# EAGLE board con connector (EAGLE 9.0.1)
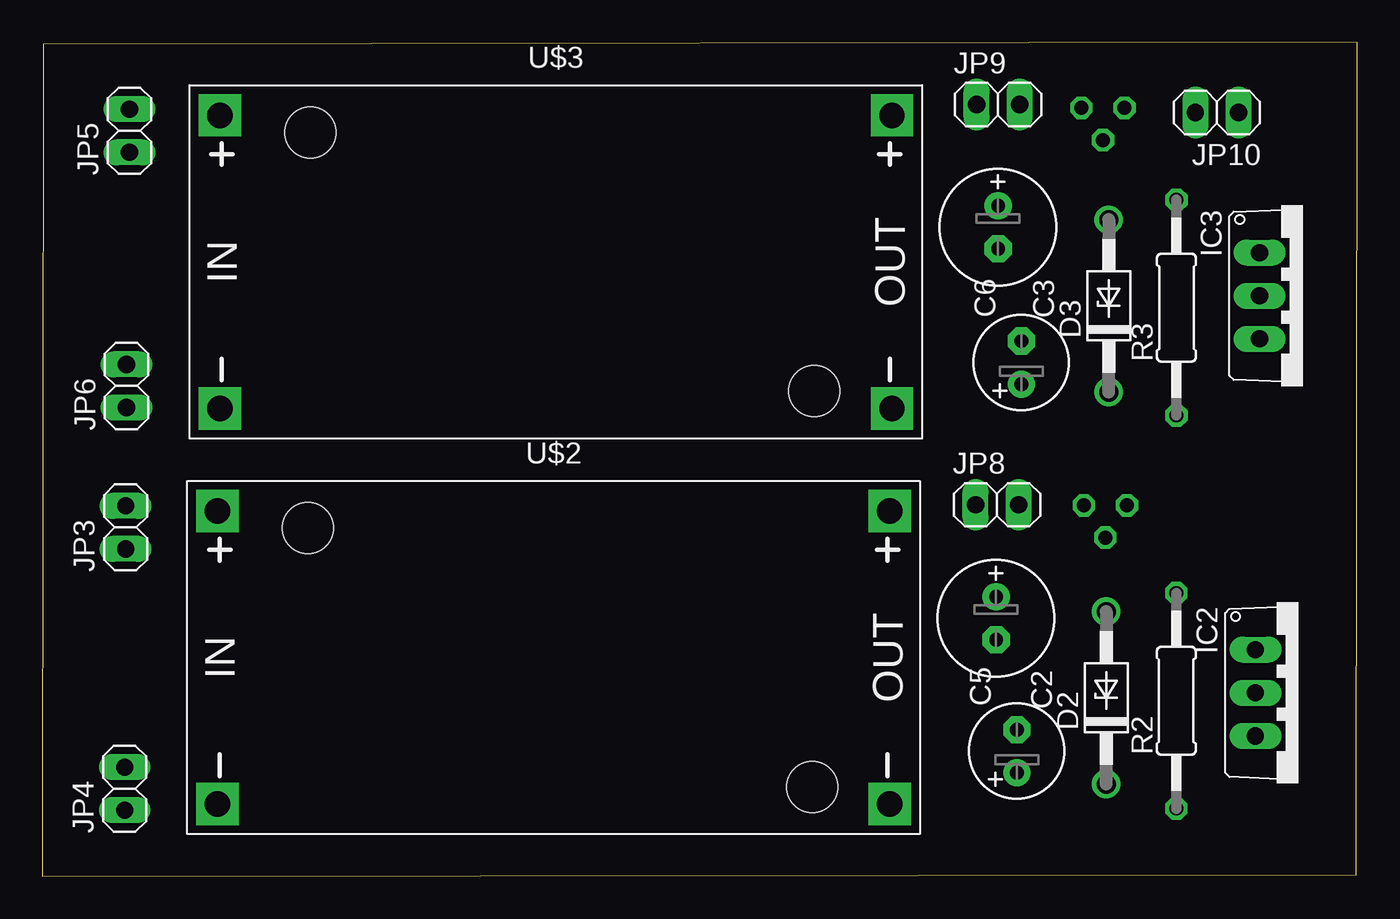
[diagram p0: board, top side]
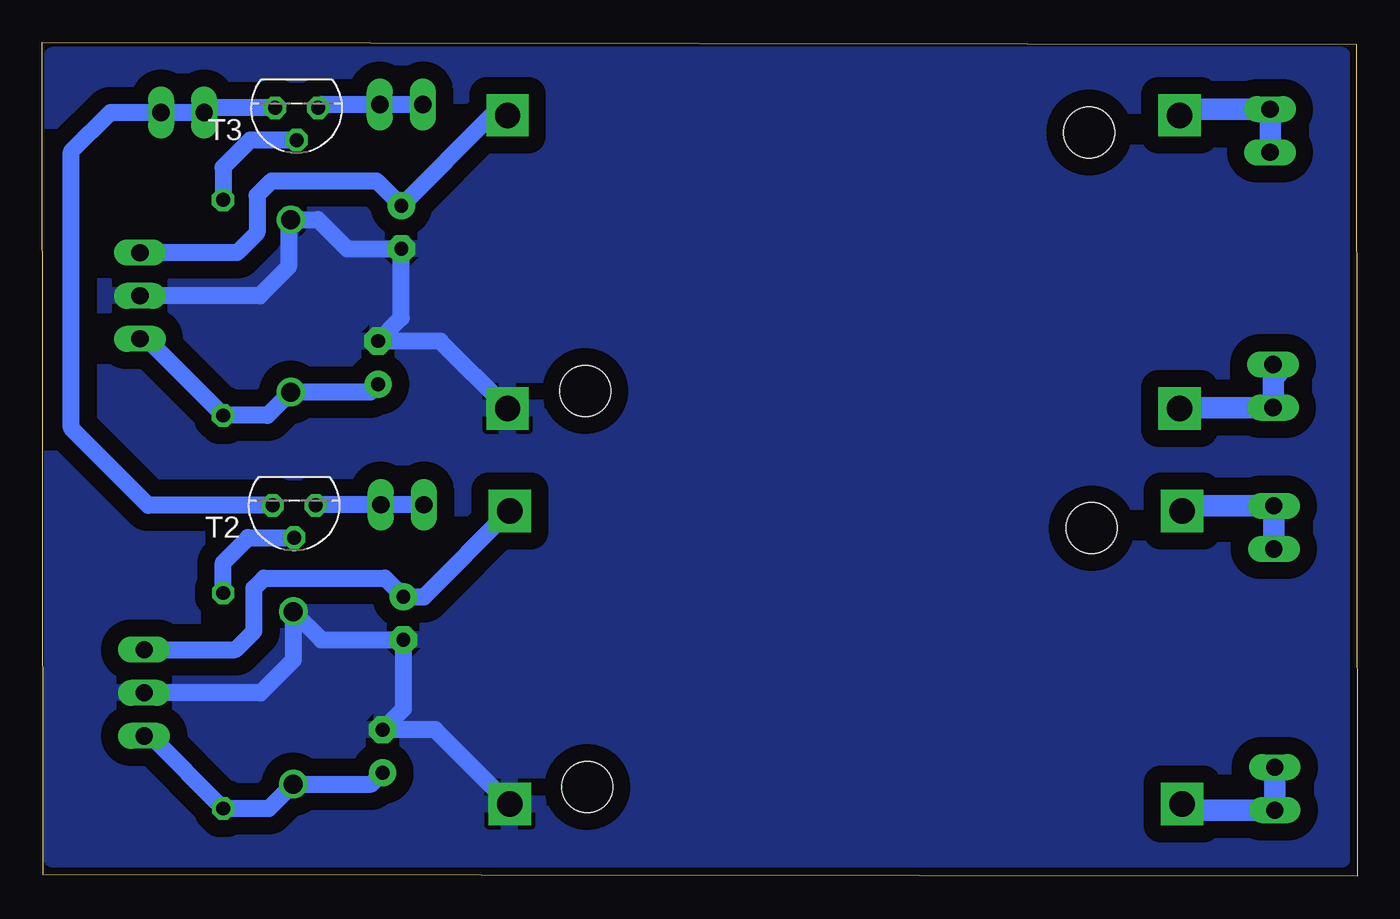
[diagram p1: board, bottom side, seen from below]

Size 77.5 x 49.15 mm. Coordinates in mm from the lower left corner, seen from the top.
Outline: 0,0 77.45,0.1 77.5,49.15 0.05,49.05 0,0
Copper layers (1*16): Top 0.035mm / dielectric 1.5mm / Bottom 0.035mm
Design rules "default *": minimum track width 30mil, minimum drill 1mm, track to track 8mil, track to pad 8mil, pad to pad 8mil, via to via 8mil, smd to smd 8mil, copper to edge 0mil, drill to drill 6mil, minimum pad ring 10mil, minimum via ring 8mil, stop-mask expansion 4mil, vias tented up to drill 0mil, thermal gap 10mil

## Footprints (pad centres in the part's own frame; a part is rotated, then mirrored left to right if it is on the bottom)
E2,5-7 = drill 0.813 pad 1.6: + -1.27,0 | drill 0.813 pad 1.6 octagon: - 1.27,0
E2,5-6 = drill 0.813 pad 1.6: + -1.27,0 | drill 0.813 pad 1.6 octagon: - 1.27,0
DO41Z10 = drill 1.118: A 5.08,0; C -5.08,0
TO220V = drill 1.016 long: 1 -2.54,-2.54; 2 0,-2.54; 3 2.54,-2.54
1X02 = drill 1.016 long: 1 -1.27,0; 2 1.27,0
0207/12 = drill 0.813 octagon: 1 -6.35,0; 2 6.35,0
TO92 = drill 0.813 octagon: 1 1.27,0; 2 0,1.905; 3 -1.27,0
DC-DC-STEP-DOWN-LM2596 = drill 1.5 pad 2.5 square: IN+ -19.812,8.636; IN- -19.812,-8.636; OUT+ 19.812,8.636; OUT- 19.812,-8.636 | hole 3: -14.478,7.62; 15.24,-7.62

## Placement (x,y rotation side)
C2  100uF  [E2,5-7]  56.22,15.21 270 top
C3  100uF'  [E2,5-7]  56.34,38.26 270 top
C5  10uF  [E2,5-6]  57.44,7.38 90 top
C6  10uF  [E2,5-6]  57.71,30.28 90 top
D2  1N4733A  [DO41Z10]  62.71,10.52 90 top
D3  1N4733A  [DO41Z10]  62.86,33.62 90 top
IC2  7805TV  [TO220V]  74.05,10.82 270 top
IC3  7805TV  [TO220V]  74.3,34.22 270 top
JP3  [1X02]  4.9,20.57 90 top
JP4  [1X02]  4.85,5.17 90 top
JP5  [1X02]  5.13,43.94 90 top
JP6  [1X02]  4.95,28.91 90 top
JP8  [1X02]  56.28,21.91 0 top
JP9  [1X02]  56.34,45.49 0 top
JP10  GND  [1X02]  69.24,45.02 180 top
R2  10k  [0207/12]  66.84,10.35 90 top
R3  10k  [0207/12]  66.85,33.52 90 top
T2  BC547  [TO92]  62.66,21.87 180 bottom
T3  BC547  [TO92]  62.52,45.3 180 bottom
U$2  DC-DC-STEP-DOWN-LM2596  [DC-DC-STEP-DOWN-LM2596]  30.14,12.9 0 top
U$3  DC-DC-STEP-DOWN-LM2596  [DC-DC-STEP-DOWN-LM2596]  30.27,36.22 0 top

## Library data of the parts
C2 C3 C5 C6 = rcl; SPICEPREFIX: C
D2 D3 = diode
IC2 IC3 = linear
JP3-JP6 JP8-JP10 = pinhead
R2 R3 = rcl; SPICEPREFIX: R
T2 T3 = transistor
U$2 U$3 = diy-modules

## Nets
GND: C2.- C3.- C5.- C6.- D2.A D3.A IC2.2 IC3.2 U$2.OUT- U$3.OUT-
N$3: C2.+ IC2.1 U$2.OUT+
N$5: C3.+ IC3.1 U$3.OUT+
N$8: C5.+ D2.C IC2.3 R2.1
N$9: C6.+ D3.C IC3.3 R3.1
N$16: R2.2 T2.2
N$17: R3.2 T3.2
N$18: JP10.1 JP10.2 T2.1 T3.1
N$22: JP3.1 JP3.2 U$2.IN+
N$23: JP4.1 JP4.2 U$2.IN-
N$24: JP5.1 JP5.2 U$3.IN+
N$25: JP6.1 JP6.2 U$3.IN-
N$27: JP8.1 JP8.2 T2.3
N$28: JP9.1 JP9.2 T3.3

## Tracks (layer width: path | path; a pad name or v marks a point on that pad's centre or on a via)
GND
  Bottom 0.762: 62.82,38.74 D3.A
  Bottom 1.016: IC2.2 64.64,10.82 62.71,12.75 D2.A 61.05,13.94 C2.- 56.22,9.87 C5.- 54.34,8.65 U$2.OUT- | IC3.2 64.69,34.22 62.99,35.92 62.99,38.56 D3.A 61.26,38.7 59.54,36.98 C3.- | C3.- | U$3.OUT- 54.04,31.55 C6.- 56.34,32.91 C3.-
  pour Bottom (isolate 1.016): 0.89,48.39 76.91,48.39 76.91,1.04 0.89,1.04
N$3
  Bottom 1.016: IC2.1 66.11,13.36 65.02,14.45 65.02,16.99 64.44,17.58 57.31,17.58 C2.+ 55.01,16.48 U$2.OUT+
N$5
  Bottom 1.016: IC3.1 66.03,36.76 64.85,37.95 64.85,40.13 63.98,41 57.8,41 C3.+ 51.01,44.86 U$3.OUT+
N$8
  Bottom 1.016: C5.+ 58.11,5.44 D2.C 64.15,4 R2.1 71.12,8.28 IC2.3
N$9
  Bottom 1.016: C6.+ 58.18,28.54 D3.C 64.23,27.17 R3.1 71.36,31.68 IC3.3
N$16
  Bottom 1.016: R2.2 66.84,18.5 65.38,19.97 T2.2
N$17
  Bottom 1.016: R3.2 66.85,41.78 65.25,43.39 T3.2
N$18
  Bottom 1.016: T3.1 67.69,45.3 JP10.2 JP10.1 73.5,45.02 75.79,42.72 75.79,26.42 71.25,21.87 T2.1 63.96,21.84
N$22
  Bottom 1.27: JP3.1 JP3.2 10.02,21.84 U$2.IN+
N$23
  Bottom 1.27: JP4.2 JP4.1 9.96,3.9 U$2.IN-
N$24
  Bottom 1.27: JP5.1 JP5.2 10.1,45.21 U$3.IN+
N$25
  Bottom 1.27: JP6.2 4.95,29.97 4.67,29.69 4.95,29.41 JP6.1 10.4,27.64 U$3.IN-
N$27
  Bottom 1.016: JP8.1 JP8.2 61.36,21.91 T2.3
N$28
  Bottom 1.016: JP9.1 JP9.2 61.05,45.49 T3.3